# Altium PCB PCB.PcbDoc (part 2 of 2)
Units mm, origin at the board's own origin, x right, y up, seen from the top; angles counter-clockwise.
Board outline 90.42 x 81.53 mm, 4 copper layers (Top Copper, PWR, GND, Bottom Copper), stack 1.57 mm thick; 86 components, 100 nets, 390 pads, 138 vias.
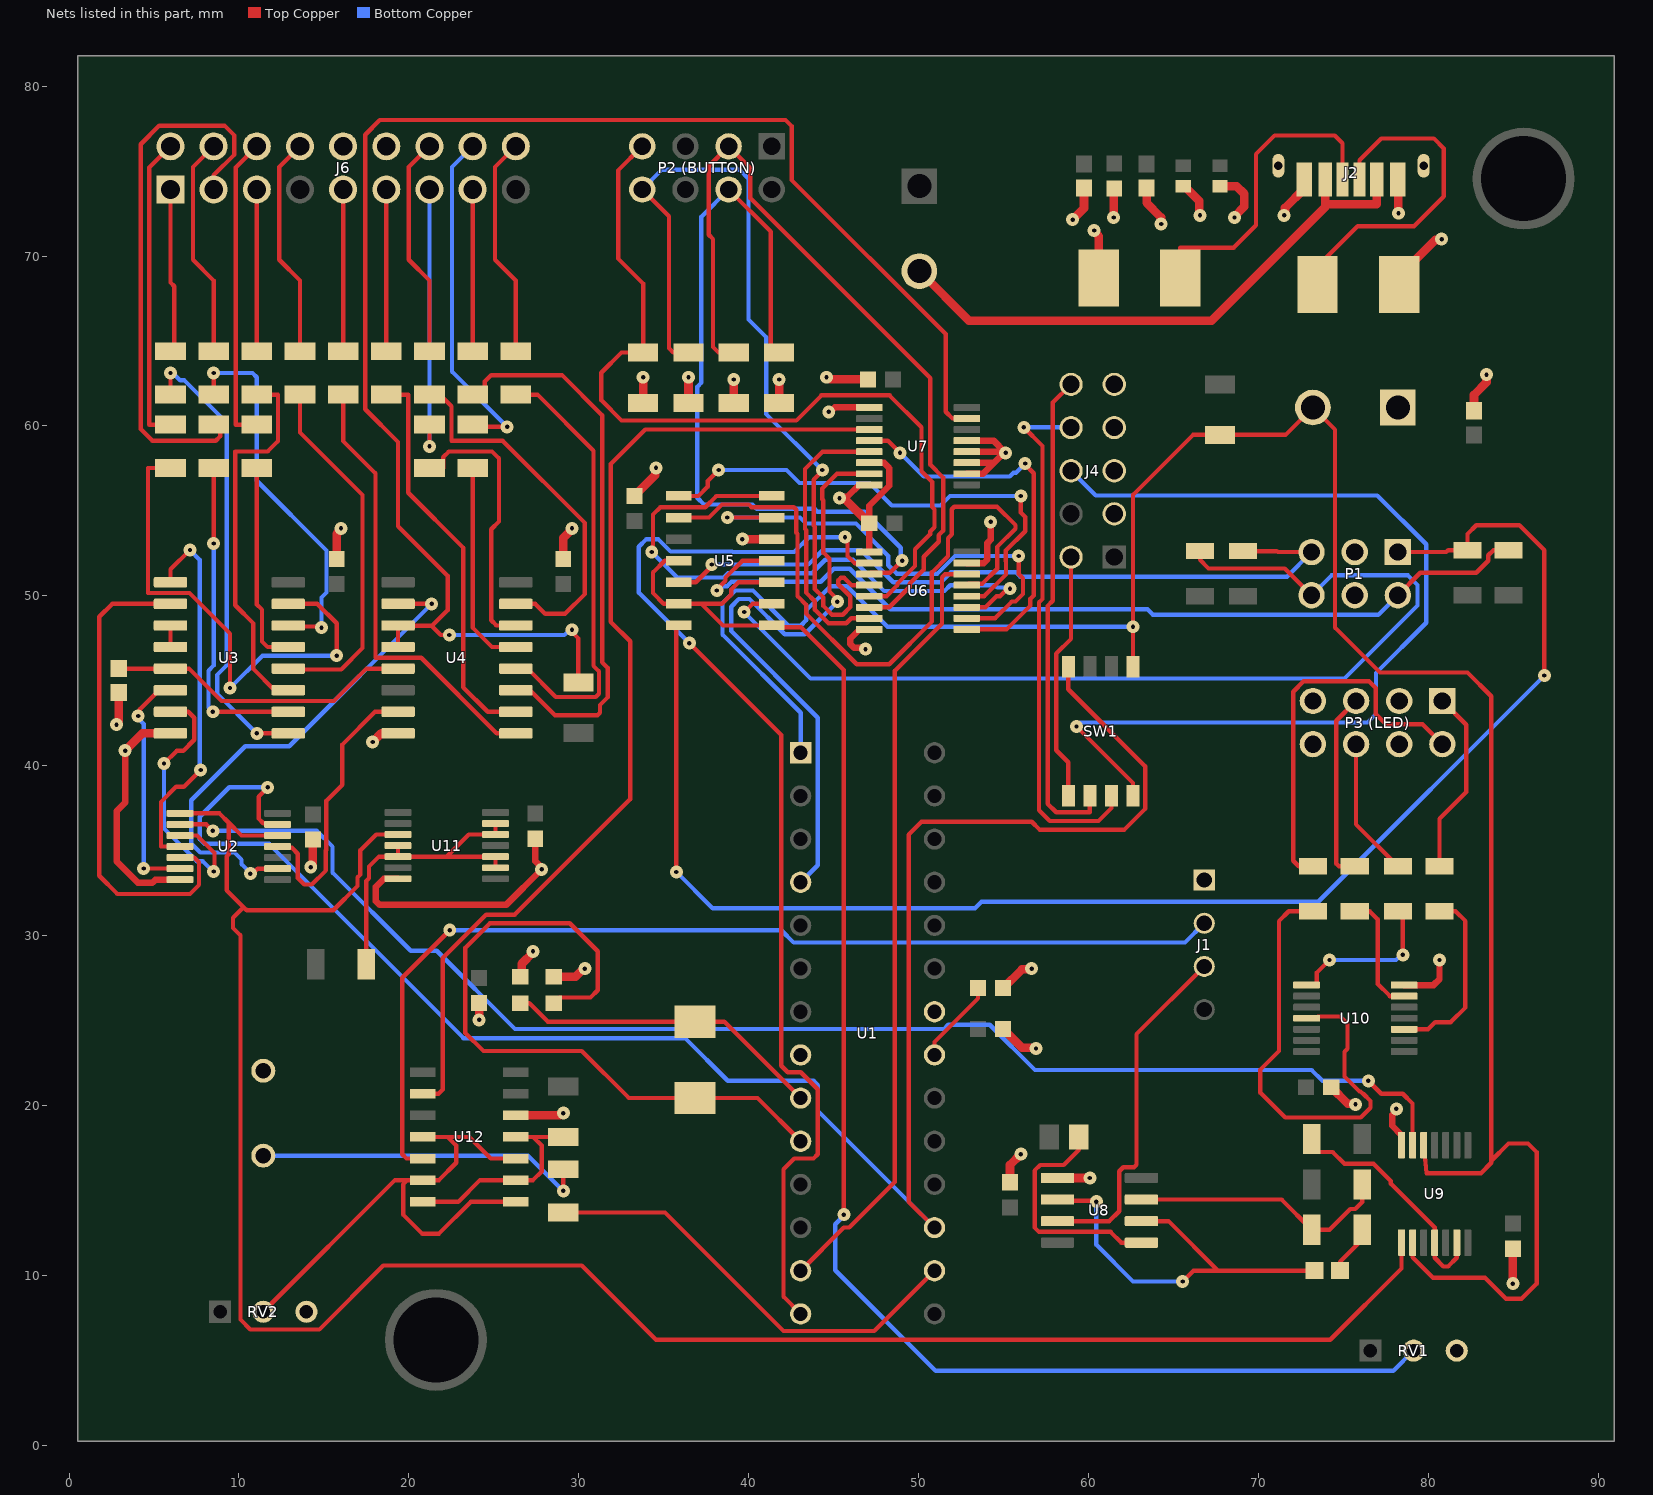
[diagram p4: the nets of this part, all layers, seen from the top]

## Via types
v1: diameter 0.762, hole 0.254, Top Copper to Bottom Copper, 138 vias

## Nets (pads, with @x,y where several pads share a name; then routed paths per layer and width w, separated by ;. In a path a pad name is that pad's centre, name@x,y a point inside that pad or via, vN(x,y) a via of type N, cw(c..) or ccw(c..) an arc to the next point about the centre after c; other vN are vias at no path point) (continued)
"Button 1": "P2 (BUTTON).3" R24.2 U6.6 | length 48.6
  Top Copper w0.254: R24.2@39.116,64.324 38.216,64.324 37.897,64.643 37.897,70.993 37.643,71.247 37.643,75.286 38.811,76.454 40.081,75.184 40.081,73.406 50.673,62.814 50.673,57.723 51.435,56.961 51.435,53.83 51.181,53.576 51.181,53.189 50.292,52.3 50.292,51.544 49.471,50.723 49.471,50.539 48.26,49.328 U6.6@47.092,49.328
"Button 2": "P2 (BUTTON).7" R25.2 U6.5 | length 51.1
  Top Copper w0.254: 33.731,76.454 32.309,75.032 32.309,69.85 33.782,68.377 R25.2@33.782,64.324 32.512,64.324 31.319,63.131 31.319,61.519 32.513,60.325 42.799,60.325 44.272,61.798 48.285,61.798 50.165,59.919 50.165,57.339 50.797,56.706 50.797,55.232 50.927,55.102 50.927,54.04 50.673,53.786 50.673,53.633 49.784,52.744 49.784,51.754 48.753,50.723 48.753,50.632 48.098,49.978 U6.5@47.092,49.978
"Button 3": "P2 (BUTTON).8" R26.2 U6.4 | length 51.5
  Top Copper w0.254: 33.731,73.914 35.306,72.339 35.306,64.578 35.56,64.324 R26.2@36.449,64.324 ; v1(44.325,57.402) 44.325,57.344 43.815,56.834 43.815,54.142 43.881,54.076 43.881,50.407 44.389,49.899 44.389,49.403 44.896,48.895 45.528,48.895 45.974,49.341 45.974,49.973 45.259,50.687 45.259,50.911 45.408,51.06 45.619,51.06 46.05,50.628 U6.4@47.092,50.628
  Bottom Copper w0.254: 33.731,73.914 34.9,75.082 39.446,75.082 39.98,74.549 39.98,66.269 41.021,65.227 41.021,60.706 v1(44.325,57.402)
"Button 4": "P2 (BUTTON).4" R27.2 U6.3 | length 46.3
  Top Copper w0.254: 38.811,73.914 41.3,71.425 41.3,64.324 R27.2@41.783,64.324 ; U6.3@47.092,51.278 47.17,51.356 48.308,51.356 v1(49.022,52.07)
  Bottom Copper w0.254: 38.811,73.914 37.211,72.314 37.211,62.549 36.961,62.299 36.961,55.771 37.36,55.372 40.216,55.372 40.47,55.118 43.878,55.118 44.045,54.951 46.827,54.951 48.946,52.832 48.946,52.146 v1(49.022,52.07)
BUTTONOUT: U6.7 U7.5 | length 16.4
  Top Copper w0.254: U6.7@47.092,48.678 46.029,48.678 45.738,48.387 44.686,48.387 43.881,49.192 43.881,49.689 43.373,50.197 43.373,53.866 43.307,53.932 43.307,57.462 44.332,58.487 U7.5@47.092,58.487
DDOWN: U5.2 U6.13 | length 40
  Top Copper w0.254: U5.2@35.865,54.61 37.657,54.61 38.419,55.372 40.005,55.372 40.157,55.22 42.65,55.22 42.799,55.071 42.799,53.721 42.865,53.656 42.865,49.986 43.373,49.478 43.373,48.956 46.355,45.974 48.26,45.974 50.775,48.489 50.775,51.384 51.72,52.33 51.72,53.397 51.943,53.62 51.943,55.096 52.092,55.245 54.61,55.245 55.691,54.164 55.691,53.953 54.613,52.875 54.613,51.823 54.624,51.812 54.624,51.602 53.729,50.706 52.91,50.706 U6.13@52.832,50.628
DECHO: U7.3 U12.2 | length 60.2
  Top Copper w0.254: U12.2@20.803,20.701 21.742,20.701 21.996,20.955 21.996,28.684 24.555,31.242 26.224,31.242 33.02,38.038 33.02,47.327 31.877,48.47 31.877,57.76 33.904,59.787 U7.3@47.092,59.787
DLEFT: U5.13 U6.10 | length 28.1
  Top Copper w0.254: v1(38.735,54.61) U5.13@41.351,54.61 ; U6.10@52.832,48.678 54.495,48.678 55.482,49.666 55.691,49.666 56.137,50.112 56.137,51.033 55.88,51.29 55.88,52.346 v1(55.883,52.349)
  Bottom Copper w0.254: v1(38.735,54.61) 43.015,54.61 43.37,54.254 46.304,54.254 48.209,52.349 48.209,51.805 48.706,51.308 51.098,51.308 52.139,52.349 v1(55.883,52.349)
DOWN: P1.5 R20.2 U5.5 | length 43.9
  Top Copper w0.254: U5.5@35.865,50.8 36.881,50.8 37.821,51.74 v1(37.821,51.845) ; R20.2@69.088,52.634 71.069,52.634 71.125,52.578 P1.5@73.116,52.578
  Bottom Copper w0.254: v1(37.821,51.845) 37.822,51.843 43.507,51.843 44.354,52.69 46.606,52.69 48.496,50.8 51.308,50.8 51.893,51.384 55.728,51.384 55.982,51.13 71.668,51.13 P1.5@73.116,52.578
DRIGHT: U5.14 U6.11 | length 35.8
  Top Copper w0.254: v1(34.29,52.578) 34.366,52.654 34.366,54.788 34.798,55.22 37.433,55.22 38.094,55.88 U5.14@41.351,55.88 ; U6.11@52.832,49.328 53.925,49.328 54.571,49.974 54.784,49.974 55.238,50.428 v1(55.375,50.428)
  Bottom Copper w0.254: v1(34.29,52.578) 35.785,51.083 38.525,51.083 38.777,51.335 43.718,51.335 44.503,52.121 46.134,52.121 47.963,50.292 51.519,50.292 51.849,50.622 54.486,50.622 54.613,50.495 55.307,50.495 v1(55.375,50.428)
DSCH: C19.1 R29.2 | length 3
  Top Copper w0.254: C19.1@74.791,10.287 74.791,10.82 76.101,12.13 R29.2@76.101,12.7
DUP: U5.1 U6.12 | length 30.1
  Top Copper w0.254: U5.1@35.865,55.88 37.034,55.88 37.582,56.428 37.582,56.759 v1(38.227,57.404) ; U6.12@52.832,49.978 53.848,49.978 55.132,51.262 55.132,52.023 55.121,52.034 55.121,52.665 56.263,53.807 56.263,54.647 56.007,54.902 v1(56.007,55.88)
  Bottom Copper w0.254: v1(38.227,57.404) 42.222,57.404 42.986,56.64 47.097,56.64 48.416,55.321 51.279,55.321 51.838,55.88 v1(56.007,55.88)
ECHO: J1.2 U12.5 | length 60.8
  Top Copper w0.254: U12.5@20.803,16.891 19.863,16.891 19.609,17.145 19.609,27.534 v1(22.403,30.328)
  Bottom Copper w0.254: v1(22.403,30.328) 41.91,30.328 42.636,29.601 65.669,29.601 J1.2@66.802,30.734
GND: "P3 (LED).3" "P3 (LED).4" "P3 (LED).7" "P3 (LED).8" C0.2 C1.2 C2.2 C3.2 C4.2 C5.2 C6.2 C8.2 C9.2 C10.2 C11.2 C12.2 C13.2 C14.2 C15.2 C16.2 C17.2 C20.1 C21.1 C22.1 C23.1 J1.1 J2.A12 J2.B12 J2.S1 J2.S2 J4.03 J4.05 J4.07 J4.09 J5.1 J6.10 J6.12 LS1.N P1.3 P1.4 R2.1 R3.1 R5.1 R24.1 R25.1 R26.1 R27.1 RV1.3 RV2.3 U1.8 U1.22 U2.7 U3.8 U4.8 U5.12 U6.1 U6.8 U6.15 U7.1 U7.6 U7.8 U7.10 U7.11 U7.12 U7.13 U8.1 U9.7 U10.7 U11.7 U12.12 | length 130.8
  Top Copper w0.381: v1(3.302,40.894) 3.302,37.842 2.794,37.334 2.794,34.385 4.052,33.126 4.905,33.126 5.081,33.302 U2.7@6.528,33.302 ; U11.7@19.355,33.356 19.341,33.341 18.511,33.341 18.059,32.889 18.059,32.037 18.282,31.813 25.717,31.813 v1(27.813,33.909) 27.813,34.012 27.432,34.393 C22.1@27.432,35.711 ; v1(44.704,60.833) 44.807,60.833 45.061,61.087 U7.1@47.092,61.087 ; v1(45.339,55.753) 45.412,55.826 45.801,55.826 46.512,56.537 U7.8@47.092,56.537 ; v1(46.863,46.863) 46.79,46.936 46.201,46.936 45.968,47.169 45.968,47.484 46.498,48.014 47.078,48.014 U6.8@47.092,48.028 ; U6.1@47.092,52.578 C15.2@47.092,54.268 47.093,54.269 47.093,55.305 48.268,56.479 48.268,57.524 47.969,57.823 47.107,57.823 U7.6@47.092,57.837 ; U6.15@52.832,51.928 53.818,51.928 54.042,52.151 54.042,53.112 54.229,53.3 v1(54.229,54.356) ; U7.10@52.832,57.187 53.782,57.188 54.432,57.837 ; U7.11@52.832,57.837 54.432,57.837 ; U7.12@52.832,58.487 v1@55.051,58.487 ; U7.13@52.832,59.137 54.401,59.137 v1@55.051,58.487 ; v1(78.105,19.812) 78.105,19.709 77.858,19.462 77.858,18.811 78.397,18.272 78.397,17.692 U9.7@78.411,17.678 ; U10.7@78.562,27.096 80.295,27.096 80.645,27.446 v1(80.645,28.575) ; 54.432,57.837 55.015,58.42 v1(55.118,58.42) v1@55.051,58.487
  Top Copper w0.508: v1(2.794,42.418) 2.794,42.487 2.921,42.614 R5.1@2.921,44.318 ; v1(3.302,40.894) 4.318,41.91 U3.8@5.969,41.91 ; v1(14.224,34.036) 14.224,34.105 14.351,34.232 C10.2@14.351,35.657 ; C11.2@15.748,52.173 15.748,53.652 16.002,53.906 v1(16.002,53.975) ; v1(17.866,41.402) 18.374,41.91 U4.8@19.359,41.91 ; v1(24.13,25.052) C23.1@24.13,26.035 ; U12.12@26.289,19.431 28.887,19.431 29.014,19.558 v1(29.083,19.558) ; C8.2@26.543,27.585 26.642,27.684 26.642,28.351 27.305,29.014 v1(27.305,29.083) ; C9.2@28.524,27.585 29.802,27.585 30.284,28.067 v1(30.353,28.067) ; C12.2@29.083,52.173 29.083,53.41 29.591,53.918 v1(29.591,53.975) ; C13.2@33.274,55.88 33.274,55.89 34.495,57.111 34.495,57.482 v1(34.544,57.531) ; R25.1@33.782,61.354 v1(33.782,62.865) ; R26.1@36.449,61.354 v1(36.449,62.865) ; R24.1@39.116,61.354 v1(39.116,62.738) ; v1(39.624,53.34) U5.12@41.351,53.34 ; R27.1@41.783,61.354 v1(41.783,62.738) ; v1(44.577,62.865) 44.646,62.865 44.773,62.738 C16.2@47.014,62.738 ; v1@45.646,55.704 47.082,54.268 C15.2@47.092,54.268 ; C4.2@54.967,24.511 54.977,24.511 56.071,23.417 56.847,23.417 v1(56.896,23.368) ; C5.2@54.967,26.924 54.977,26.924 56.071,28.018 56.593,28.018 v1(56.642,28.067) ; C17.2@55.372,15.494 55.372,16.51 v1(56.007,17.145) ; U8.1@58.166,15.748 v1(60.071,15.748) ; v1(59.055,72.136) 59.725,72.806 C14.2@59.725,74.002 ; v1(60.325,71.501) 60.325,71.432 60.587,71.17 R2.1@60.587,68.707 ; v1(61.468,72.263) 61.485,72.28 61.485,73.956 C3.2@61.503,73.973 ; C2.2@63.408,74.002 63.408,73.127 64.262,72.273 v1(64.262,71.881) ; C1.2@65.567,74.111 65.642,74.111 66.499,73.253 66.499,72.439 v1(66.548,72.39) ; C0.2@67.726,74.111 68.706,74.111 69.157,73.66 69.157,72.909 68.58,72.332 v1(68.58,72.263) ; v1(71.501,72.39) 71.55,72.439 71.55,72.823 72.688,73.961 J2.B12@72.688,74.511 ; C21.1@74.271,21.082 74.281,21.082 75.238,20.125 75.654,20.125 v1(75.702,20.076) ; J2.A12@78.188,74.511 78.21,74.489 78.21,72.539 v1(78.232,72.517) ; R3.1@78.276,68.326 78.276,68.826 80.394,70.944 80.723,70.944 v1(80.772,70.993) ; C6.2@82.677,60.893 82.677,61.827 83.414,62.564 v1(83.414,63.015) ; v1(84.963,9.525) C20.1@84.963,11.581
IMUXA: U1.13 U6.14 | length 46
  Top Copper w0.254: U1.13@43.053,10.287 45.593,12.827 45.909,12.827 48.59,15.509 48.59,45.586 51.365,48.361 51.365,51.101 51.543,51.278 U6.14@52.832,51.278
IMUXB: U1.14 U6.2 | length 67.5
  Top Copper w0.254: v1(36.5,47.219) 41.91,41.808 41.91,22.352 42.291,21.971 43.053,21.971 44.059,20.965 44.059,17.145 43.805,16.891 42.672,16.891 42.037,16.256 42.037,8.763 U1.14@43.053,7.747 ; v1(45.659,53.452) 45.81,53.301 45.81,52.346 46.228,51.928 U6.2@47.092,51.928
  Bottom Copper w0.254: v1(36.5,47.219) 33.528,50.19 33.528,52.894 33.974,53.34 34.666,53.34 35.399,52.607 39.018,52.607 39.048,52.578 42.667,52.578 43.541,53.452 v1(45.659,53.452)
INC: U2.1 U2.12 U9.8 U11.3 | length 123.8
  Top Copper w0.254: U2.1@6.528,37.202 8.848,37.202 9.398,36.652 ; U2.12@12.268,35.902 10.148,35.902 9.398,36.652 ; U11.3@19.355,35.956 18.074,35.956 17.145,35.027 17.145,33.6 16.979,33.434 16.979,32.922 15.553,31.496 10.458,31.496 10.271,31.683 ; U9.8@78.411,11.938 78.411,10.416 74.218,6.223 34.544,6.223 30.175,10.592 18.491,10.592 14.732,6.833 10.668,6.833 10.084,7.417 10.084,30.023 9.652,30.455 9.652,31.064 10.271,31.683 ; 9.398,36.652 9.398,34.798 9.271,34.671 9.271,32.683 10.271,31.683
INPUT: U1.4 U7.7 | length 37
  Top Copper w0.254: v1(45.212,49.657) 45.212,49.794 44.751,50.255 44.751,52.182 44.389,52.545 44.389,55.626 44.323,55.691 44.323,56.323 45.187,57.187 U7.7@47.092,57.187
  Bottom Copper w0.254: U1.4@43.053,33.147 44.059,34.153 44.059,42.833 38.962,47.93 38.962,49.365 39.408,49.811 40.039,49.811 42.111,47.739 43.294,47.739 v1(45.212,49.657)
JOYSTICKOUT: U6.9 U7.4 | length 23.3
  Top Copper w0.254: U7.4@47.092,59.137 48.178,59.137 v1(48.895,58.42) ; U6.9@52.832,48.028 55.165,48.028 56.57,49.433 56.57,49.826 56.771,50.027 56.771,57.217 56.261,57.727 v1(56.261,57.785)
  Bottom Copper w0.254: v1(48.895,58.42) 50.292,57.023 55.354,57.023 55.577,57.246 55.722,57.246 v1(56.261,57.785)
LED1: R31.1 U10.3 | length 11
  Top Copper w0.254: U10.3@78.562,24.496 79.97,24.496 80.391,24.917 81.305,24.917 82.169,25.781 82.169,30.861 81.59,31.44 R31.1@80.645,31.44
LED1A: J6.6 R6.2 | length 18.1
  Top Copper w0.254: R6.2@11.049,60.076 9.804,60.076 9.804,75.209 J6.6@11.049,76.454
LED1B: J6.8 R7.2 | length 13.1
  Top Copper w0.254: R7.2@13.589,64.394 13.589,68.555 12.37,69.774 12.37,75.235 J6.8@13.589,76.454
LED1C: J6.5 R8.2 | length 9.5
  Top Copper w0.254: R8.2@11.049,64.394 J6.5@11.049,73.914
LED1D: J6.3 R9.2 | length 32.8
  Top Copper w0.254: R9.2@8.509,60.076 8.89,60.076 8.89,59.385 8.636,59.131 4.902,59.131 4.216,59.817 4.216,76.581 5.309,77.673 9.144,77.673 9.728,77.089 9.728,75.968 8.509,74.748 J6.3@8.509,73.914
LED1E: J6.1 R10.2 | length 9.8
  Top Copper w0.254: R10.2@5.969,64.394 6.188,64.394 6.188,68.224 5.969,68.444 J6.1@5.969,73.914
LED1F: J6.2 R11.2 | length 18.1
  Top Copper w0.254: R11.2@5.969,60.076 4.724,60.076 4.724,75.209 J6.2@5.969,76.454
LED1G: J6.4 R12.2 | length 13.1
  Top Copper w0.254: R12.2@8.509,64.394 8.509,68.555 7.29,69.774 7.29,75.235 J6.4@8.509,76.454
LED2: R32.1 U10.6 | length 7.2
  Top Copper w0.254: R32.1@75.656,31.44 76.533,31.44 77.008,30.965 77.008,27.162 77.724,26.446 U10.6@78.562,26.446
LED2A: J6.16 R13.2 | length 20.4
  Top Copper w0.254: R13.2@23.749,60.076 23.881,59.944 v1(25.781,59.944)
  Bottom Copper w0.254: J6.16@23.749,76.454 22.53,75.235 22.53,63.195 v1(25.781,59.944)
LED2B: J6.18 R14.2 | length 13.1
  Top Copper w0.254: R14.2@26.289,64.394 26.289,68.555 25.07,69.774 25.07,75.235 J6.18@26.289,76.454
LED2C: J6.15 R15.2 | length 9.5
  Top Copper w0.254: R15.2@23.749,64.394 J6.15@23.749,73.914
LED2D: J6.11 R16.2 | length 9.5
  Top Copper w0.254: R16.2@18.669,64.394 J6.11@18.669,73.914
LED2E: J6.9 R17.2 | length 9.5
  Top Copper w0.254: R17.2@16.129,64.394 J6.9@16.129,73.914
LED2F: J6.14 R18.2 | length 13.1
  Top Copper w0.254: R18.2@21.209,64.394 21.209,68.555 19.99,69.774 19.99,75.235 J6.14@21.209,76.454
LED2G: J6.13 R19.2 | length 16.4
  Top Copper w0.254: v1(21.209,58.801) R19.2@21.209,60.076
  Bottom Copper w0.254: v1(21.209,58.801) J6.13@21.209,73.914
LED3: R33.1 U10.8 | length 9.6
  Top Copper w0.254: U10.8@72.822,27.096 73.351,27.096 73.429,27.174 73.429,27.836 v1(74.168,28.575) ; R33.1@78.196,31.44 78.486,31.44 v1(78.486,28.88)
  Bottom Copper w0.254: v1(74.168,28.575) 78.083,28.575 78.388,28.88 v1(78.486,28.88)
LED4: R34.1 U10.11 | length 28.4
  Top Copper w0.254: U10.11@72.822,25.146 73.381,25.146 73.482,25.248 74.803,25.248 75.235,24.816 75.235,23.346 75.057,23.168 75.057,21.717 75.935,20.838 76.001,20.838 76.138,20.701 76.155,20.701 76.581,20.275 76.581,19.877 76.008,19.304 71.566,19.304 70.104,20.766 70.104,22.123 71.196,23.216 71.196,30.861 71.775,31.44 R34.1@73.196,31.44
LEFT: P1.2 R23.2 U5.11 | length 54.1
  Top Copper w0.254: v1(38.122,50.321) 38.122,50.388 38.627,50.893 38.627,51.073 39.624,52.07 U5.11@41.351,52.07 ; P1.2@78.196,50.038 79.517,51.359 82.804,51.359 83.515,52.07 83.515,52.385 83.82,52.69 R23.2@84.709,52.69
  Bottom Copper w0.254: v1(38.122,50.321) 38.259,50.321 38.513,50.575 38.735,50.575 38.987,50.827 44.233,50.827 45.004,51.598 45.939,51.598 48.328,49.208 63.466,49.208 63.779,48.895 70.928,48.895 70.941,48.882 77.04,48.882 P1.2@78.196,50.038
"Logical 0": R5.2 U3.5 U4.5 | length 18
  Top Copper w0.254: R5.2@2.921,45.72 U3.5@5.969,45.72 7.061,45.72 8.966,43.815 15.596,43.815 17.501,45.72 U4.5@19.359,45.72
"Logical 1": U3.3 U3.4 | length 1.3
  Top Copper w0.254: U3.4@5.969,46.99 U3.3@5.969,48.26
NetC5_1: C5.1 U1.21 | length 5
  Top Copper w0.254: U1.21@50.927,22.987 50.927,23.749 53.491,26.313 C5.1@53.491,26.924
NetC18_1: C18.1 U8.5 | length 13.9
  Top Copper w0.254: C18.1@59.422,18.161 59.422,17.399 58.533,16.51 57.15,16.51 56.82,16.18 56.82,12.827 57.074,12.573 61.29,12.573 61.925,11.938 U8.5@63.106,11.938
NetC19_2: C19.2 U8.2 U8.6 | length 24.6
  Top Copper w0.254: U8.2@58.166,14.478 58.229,14.414 60.389,14.414 v1(60.452,14.351) ; U8.6@63.106,13.208 64.694,13.208 67.615,10.287 ; v1(65.532,9.652) 66.167,10.287 67.615,10.287 ; C19.2@73.291,10.287 67.615,10.287
  Bottom Copper w0.254: v1(60.452,14.351) 60.452,11.811 62.611,9.652 v1(65.532,9.652)
NetJ2_A5: J2.A5 R2.2 | length 18.8
  Top Copper w0.254: R2.2@65.397,68.707 65.397,70.485 68.529,70.485 69.85,71.806 69.85,75.997 70.942,77.089 74.484,77.089 74.938,76.635 J2.A5@74.938,74.511
NetJ2_A9: J2.A9 J2.B9 J3.2 | length 34
  Top Copper w0.508: J3.2@50.038,69.111 52.957,66.192 67.234,66.192 73.918,72.877 73.918,73.05 ; J2.B9@73.918,74.511 73.918,73.05 ; J2.A9@76.958,74.511 76.958,73.05 73.918,73.05
NetJ2_B5: J2.B5 R3.2 | length 19.9
  Top Copper w0.254: R3.2@73.466,68.326 73.466,69.393 75.828,71.755 79.146,71.755 80.899,73.508 80.899,76.327 80.315,76.911 77.216,76.911 75.938,75.633 J2.B5@75.938,74.511
NetLS1_P: LS1.P R36.2 | length 19.8
  Top Copper w0.254: v1(29.083,14.986) R36.2@29.083,16.261
  Bottom Copper w0.254: LS1.P@11.43,17.058 27.011,17.058 v1(29.083,14.986)
"NetP3 (LED)_1": "P3 (LED).1" R31.2 | length 11
  Top Copper w0.254: R31.2@80.645,34.092 80.645,36.881 82.22,38.456 82.22,42.411 80.816,43.815
"NetP3 (LED)_2": "P3 (LED).2" R34.2 | length 22.7
  Top Copper w0.254: R34.2@73.196,34.092 72.359,34.092 72.034,34.417 72.034,44.361 72.644,44.971 76.498,44.971 76.892,44.577 76.892,43.053 77.502,42.443 79.648,42.443 80.816,41.275
"NetP3 (LED)_5": "P3 (LED).5" R32.2 | length 11.2
  Top Copper w0.254: R32.2@75.656,34.092 74.727,34.092 74.574,34.244 74.574,42.653 75.736,43.815
"NetP3 (LED)_6": "P3 (LED).6" R33.2 | length 8.2
  Top Copper w0.254: 75.736,41.275 75.736,36.552 R33.2@78.196,34.092
NetR6_1: R6.1 U3.13 | length 12
  Top Copper w0.254: R6.1@11.049,57.526 11.049,49.497 11.355,49.191 11.355,47.319 11.684,46.99 U3.13@12.899,46.99
NetR7_1: R7.1 U3.12 | length 21.4
  Top Copper w0.254: U3.12@12.899,45.72 13.437,45.72 13.487,45.669 16.013,45.669 17.272,46.928 17.272,55.931 13.589,59.614 R7.1@13.589,61.844
NetR8_1: R8.1 U3.11 | length 22.6
  Top Copper w0.254: R8.1@11.049,61.844 12.294,61.844 12.294,59.106 11.684,58.496 9.779,58.496 9.779,49.447 10.847,48.378 10.847,45.693 12.09,44.45 U3.11@12.899,44.45
NetR9_1: R9.1 U3.10 | length 19
  Top Copper w0.254: v1(8.458,43.18) U3.10@12.899,43.18 ; v1(8.509,53.086) R9.1@8.509,57.526
  Bottom Copper w0.254: v1(8.458,43.18) 8.204,43.434 8.204,45.593 8.509,45.898 v1(8.509,53.086)
NetR10_1: R10.1 U3.9 | length 27.1
  Top Copper w0.254: R10.1@5.969,61.844 v1(5.969,63.119) ; v1(11.049,41.91) U3.9@12.899,41.91
  Bottom Copper w0.254: v1(5.969,63.119) 6.106,63.119 6.545,62.681 6.788,62.681 9.271,60.198 9.271,45.898 8.712,45.339 8.712,44.247 v1(11.049,41.91)
NetR11_1: R11.1 U3.15 | length 30
  Top Copper w0.254: R11.1@5.969,57.526 4.648,57.526 4.648,50.165 7.087,50.165 9.474,47.777 v1(9.474,44.577) ; U3.15@12.899,49.53 14.605,49.53 15.748,48.387 v1(15.748,46.482)
  Bottom Copper w0.254: v1(9.474,44.577) 11.379,46.482 v1(15.748,46.482)
NetR12_1: R12.1 U3.14 | length 22.5
  Top Copper w0.254: R12.1@8.509,61.844 v1(8.509,63.119) ; U3.14@12.899,48.26 12.962,48.197 14.795,48.197 v1(14.859,48.133)
  Bottom Copper w0.254: v1(8.509,63.119) 10.795,63.119 11.049,62.865 11.049,56.777 15.154,52.672 15.154,50.198 14.859,49.903 v1(14.859,48.133)
NetR13_1: R13.1 U4.13 | length 12.4
  Top Copper w0.254: R13.1@23.749,57.526 23.749,48.133 24.892,46.99 U4.13@26.289,46.99
NetR14_1: R14.1 U4.12 | length 26
  Top Copper w0.254: U4.12@26.289,45.72 26.969,45.72 28.644,44.045 30.992,44.045 31.184,44.237 31.184,45.558 30.861,45.881 30.861,58.545 27.562,61.844 R14.1@26.289,61.844
NetR15_1: R15.1 U4.11 | length 33
  Top Copper w0.254: R15.1@23.749,61.844 24.46,61.844 24.46,62.611 24.841,62.992 29.007,62.992 31.369,60.63 31.369,46.091 31.692,45.768 31.692,44.026 31.242,43.576 31.242,43.126 31.093,42.977 28.6,42.977 27.127,44.45 U4.11@26.289,44.45
NetR16_1: R16.1 U4.10 | length 23.5
  Top Copper w0.254: R16.1@18.669,61.844 19.964,61.844 19.964,56.066 23.19,52.84 23.19,44.628 24.638,43.18 U4.10@26.289,43.18
NetR17_1: R17.1 U4.9 | length 26.4
  Top Copper w0.254: R17.1@16.129,61.844 16.129,59.114 18.034,57.209 18.034,46.355 20.727,46.355 25.172,41.91 U4.9@26.289,41.91
NetR18_1: R18.1 U4.15 | length 22.4
  Top Copper w0.254: R18.1@21.209,61.844 21.824,61.844 22.504,61.163 22.504,59.131 25.512,59.131 30.353,54.291 30.353,50.114 29.185,48.946 28.016,48.946 27.432,49.53 U4.15@26.289,49.53
NetR19_1: R19.1 U4.14 | length 16.3
  Top Copper w0.254: R19.1@21.209,57.526 22.022,57.526 22.022,58.166 22.352,58.496 24.892,58.496 25.298,58.09 25.298,54.381 24.841,53.924 24.841,48.565 25.146,48.26 U4.14@26.289,48.26
NetR28_1: R28.1 R29.1 U8.7 | length 15.4
  Top Copper w0.254: U8.7@63.106,14.478 71.353,14.478 R29.1@73.131,12.7 74.168,12.7 75.387,13.919 75.692,13.919 76.101,14.328 R28.1@76.101,15.367
NetR30_1: R30.1 U9.11 U9.13 | length 14.1
  Top Copper w0.254: R30.1@73.131,18.034 73.131,17.674 73.529,17.276 74.356,17.276 75.053,16.579 76.761,16.579 77.775,15.566 77.775,15.413 80.361,12.827 U9.11@80.361,11.938 80.361,11.049 80.869,10.541 81.153,10.541 81.661,11.049 U9.13@81.661,11.938
NetR35_1: R35.1 U11.4 U11.5 U11.9 U11.10 U11.12 U11.13 | length 18.9
  Top Copper w0.254: R35.1@17.487,28.321 17.487,33.223 17.653,33.389 17.653,34.075 18.234,34.656 U11.5@19.355,34.656 ; U11.4@19.355,35.306 U11.5@19.355,34.656 ; U11.9@25.095,34.006 U11.10@25.095,34.656 22.225,34.656 ; U11.13@25.095,36.606 U11.12@25.095,35.956 23.525,35.956 22.225,34.656 ; U11.5@19.355,34.656 22.225,34.656
NetR37_1: R37.1 U12.7 U12.9 U12.11 | length 12.8
  Top Copper w0.254: U12.7@20.803,14.351 22.911,14.351 24.181,15.621 U12.9@26.289,15.621 27.305,15.621 27.813,16.129 27.813,17.653 27.305,18.161 ; U12.11@26.289,18.161 27.305,18.161 ; R37.1@29.083,18.161 27.305,18.161
NetRV1_2: RV1.2 U5.4 U5.6 U5.8 U5.10 | length 93.5
  Top Copper w0.254: U5.4@35.865,52.07 35.052,52.07 34.366,51.384 34.366,50.165 35.001,49.53 U5.6@35.865,49.53 37.211,49.53 ; U5.10@41.351,50.8 39.392,50.8 38.962,50.37 38.962,50.083 38.408,49.53 37.211,49.53 ; v1(45.593,13.589) 45.593,45.637 43.074,48.155 41.456,48.155 U5.8@41.351,48.26 38.481,48.26 37.211,49.53
  Bottom Copper w0.254: v1(45.593,13.589) 45.593,13.527 45.085,13.019 45.085,10.312 51.003,4.394 77.927,4.394 RV1.2@79.121,5.588
NetRV2_2: RV2.2 U12.4 U12.6 U12.8 U12.10 | length 32.7
  Top Copper w0.254: RV2.2@11.43,7.874 19.177,15.621 19.914,15.621 ; U12.4@20.803,18.161 22.276,18.161 ; U12.8@26.289,14.351 23.647,14.351 21.768,12.471 20.777,12.471 19.66,13.589 19.66,15.367 19.914,15.621 ; U12.10@26.289,16.891 24.816,16.891 23.546,18.161 22.276,18.161 ; 19.914,15.621 U12.6@20.803,15.621 21.768,15.621 22.784,16.637 22.784,17.653 22.276,18.161
NetU2_3: U2.3 U3.7 | length 16.6
  Top Copper w0.254: v1(5.588,40.132) 6.335,40.879 6.716,40.879 7.366,41.529 7.366,42.824 7.01,43.18 U3.7@5.969,43.18 ; U2.3@6.528,35.902 7.532,35.902 8.56,34.874 8.56,33.833 v1(8.509,33.782)
  Bottom Copper w0.254: v1(5.588,40.132) 5.588,36.315 7.511,34.392 7.861,34.392 8.471,33.782 v1(8.509,33.782)
NetU2_4: U2.4 U3.1 | length 22.4
  Top Copper w0.254: U3.1@5.969,50.8 5.969,51.562 v1(7.112,52.705) ; U2.4@6.528,35.252 5.41,35.252 5.41,37.871 6.301,38.763 6.759,38.763 v1(7.747,39.751)
  Bottom Copper w0.254: v1(7.112,52.705) 7.112,52.703 7.696,52.119 7.696,39.802 v1(7.747,39.751)
NetU2_5: U2.5 U3.2 | length 28.8
  Top Copper w0.254: U3.2@5.969,49.53 2.54,49.53 1.778,48.768 1.778,33.528 2.845,32.461 7.112,32.461 7.645,32.995 7.645,34.323 7.366,34.602 U2.5@6.528,34.602
NetU2_6: U2.6 U3.6 | length 14
  Top Copper w0.254: v1(4.064,42.926) 4.161,43.023 4.161,43.322 5.289,44.45 U3.6@5.969,44.45 ; v1(4.394,33.952) U2.6@6.528,33.952
  Bottom Copper w0.254: v1(4.064,42.926) 4.064,42.789 4.394,42.458 v1(4.394,33.952)
NetU2_9: U2.9 U4.2 | length 29.6
  Top Copper w0.254: v1(10.668,33.655) 10.805,33.655 11.102,33.952 U2.9@12.268,33.952 ; U4.2@19.359,49.53 v1(21.336,49.53)
  Bottom Copper w0.254: v1(10.668,33.655) 10.668,33.696 10.149,34.214 10.149,34.478 9.728,34.9 7.722,34.9 7.188,35.433 7.188,37.973 10.363,41.148 12.954,41.148 v1(21.336,49.53)
NetU2_11: U2.11 U4.7 | length 16.8
  Top Copper w0.254: U2.11@12.268,35.252 12.346,35.174 13.118,35.174 13.462,34.83 13.462,33.401 13.843,33.02 14.286,33.02 15.113,33.847 15.113,35.017 15.143,35.047 15.143,37.941 16.084,38.882 16.084,41.255 18.009,43.18 U4.7@19.359,43.18
PB3: J4.02 SW1.1.1 | length 14.7
  Top Copper w0.254: SW1.1.1@58.801,38.242 58.801,40.208 58.094,40.915 58.094,46.602 58.963,47.471 J4.02@58.963,52.285
PB4: J4.10 SW1.2.1 | length 28.9
  Top Copper w0.254: J4.10@58.963,62.445 57.892,61.374 57.892,49.711 57.586,49.405 57.586,37.766 58.09,37.262 60.071,37.262 SW1.2.1@60.071,38.242
PB5: J4.08 SW1.3.1 | length 31.4
  Top Copper w0.254: v1(56.185,59.919) 57.279,58.825 57.279,49.817 57.078,49.616 57.078,37.385 57.709,36.754 60.579,36.754 61.341,37.516 SW1.3.1@61.341,38.242
  Bottom Copper w0.254: v1(56.185,59.919) 58.949,59.919 J4.08@58.963,59.905
PC6: J4.06 SW1.4.1 | length 57.3
  Top Copper w0.254: v1(59.284,42.316) 62.611,38.989 SW1.4.1@62.611,38.242
  Bottom Copper w0.254: J4.06@58.963,57.365 60.422,55.905 76.987,55.905 79.86,53.033 79.86,48.415 76.911,45.466 76.911,43.053 76.403,42.545 59.512,42.545 v1(59.284,42.316)
PULLUP1: R4.2 U4.3 U4.4 U7.15 | length 96
  Top Copper w0.254: U4.4@19.359,46.99 U4.3@19.359,48.26 ; v1(22.377,47.701) 21.869,47.701 21.349,48.222 ; v1(29.591,48.006) 29.591,47.869 29.972,47.488 R4.2@29.972,44.897 ; U7.15@52.832,60.437 51.983,60.437 51.587,60.833 51.587,65.405 42.52,74.473 42.52,77.648 42.164,78.003 18.288,78.003 17.424,77.14 17.424,60.985 19.355,59.055 19.355,54.102 22.276,51.181 22.276,49.149 21.349,48.222 ; U4.3@19.359,48.26 21.349,48.222 ; U4.3@19.359,48.26 21.311,48.26 21.349,48.222
  Bottom Copper w0.254: v1(22.377,47.701) 29.149,47.701 29.454,48.006 v1(29.591,48.006)
RESET: J5.2 R1.2 SW1.4.2 U1.1 U9.5 U9.9 | length 139.3
  Top Copper w0.254: SW1.4.2@62.611,45.832 v1(62.611,48.184) 62.611,55.944 66.142,59.475 R1.2@67.726,59.475 71.584,59.475 J5.2@73.196,61.087 74.498,59.785 74.498,48.133 77.14,45.491 82.296,45.491 83.693,44.094 83.693,16.764 ; U9.9@79.061,11.938 79.061,11.084 80.264,9.881 83.317,9.881 84.562,8.636 85.471,8.636 86.36,9.525 86.36,17.272 85.852,17.78 84.709,17.78 83.693,16.764 ; U9.5@79.711,17.678 79.883,16.027 83.083,16.027 83.693,16.637 83.693,16.764
  Bottom Copper w0.254: U1.1@43.053,40.767 43.053,43.121 38.454,47.72 38.454,49.575 39.198,50.319 40.25,50.319 42.322,48.247 43.053,48.247 43.373,48.567 43.373,49.139 44.806,50.571 45.771,50.571 48.158,48.184 v1(62.611,48.184)
RIGHT: P1.6 R22.2 U5.9 | length 61
  Top Copper w0.254: v1(39.724,49.049) 39.74,49.049 40.221,49.53 U5.9@41.351,49.53 ; R22.2@66.548,52.634 66.548,52.121 67.056,51.613 71.541,51.613 P1.6@73.116,50.038
  Bottom Copper w0.254: v1(39.724,49.049) 43.637,45.136 75.057,45.136 79.352,49.431 79.352,50.645 78.791,51.206 74.284,51.206 P1.6@73.116,50.038
RST7: U2.2 U9.6 | length 82.9
  Top Copper w0.254: U2.2@6.528,36.552 8.076,36.552 v1(8.458,36.17) ; v1(76.454,21.463) 77.216,20.701 78.486,20.701 79.061,20.126 U9.6@79.061,17.678
  Bottom Copper w0.254: v1(8.458,36.17) 14.58,36.17 15.506,35.243 15.506,33.715 20.108,29.113 21.636,29.113 26.238,24.511 51.486,24.511 51.74,24.765 54.178,24.765 56.845,22.098 73.12,22.098 73.755,21.463 v1(76.454,21.463)
SCORE: SW1.1.2 U1.17 U2.13 | length 111.8
  Top Copper w0.254: v1(11.684,38.735) 11.684,38.713 11.156,38.185 11.156,36.896 11.427,36.625 11.61,36.625 11.683,36.552 U2.13@12.268,36.552 ; U1.17@50.927,12.827 49.413,14.341 49.413,35.951 50.165,36.703 56.656,36.703 57.113,36.246 62.103,36.246 63.322,37.465 63.322,39.98 58.801,44.501 SW1.1.2@58.801,45.832
  Bottom Copper w0.254: v1(11.684,38.735) 9.423,38.735 7.696,37.008 7.696,35.687 7.976,35.408 11.775,35.408 23.205,23.978 36.246,23.978 38.76,21.463 43.815,21.463 44.069,21.209 44.069,19.685 U1.17@50.927,12.827
SPKR: R36.1 U1.16 | length 26.2
  Top Copper w0.254: R36.1@29.083,13.711 35.067,13.711 42.037,6.741 47.381,6.741 U1.16@50.927,10.287
TRIG: J1.3 U8.3 | length 20.7
  Top Copper w0.254: U8.3@58.166,13.208 61.214,13.208 61.794,13.788 61.794,16.14 62.029,16.375 62.67,16.375 62.819,16.524 62.819,24.211 J1.3@66.802,28.194
UP: P1.1 R21.2 U5.7 | length 90.1
  Top Copper w0.254: v1(35.738,33.757) 35.738,48.26 U5.7@35.865,48.26 ; P1.1@78.196,52.578 81.044,52.578 81.157,52.69 R21.2@82.296,52.69 82.296,53.645 82.804,54.153 85.344,54.153 86.817,52.68 v1(86.817,45.314)
  Bottom Copper w0.254: v1(35.738,33.757) 37.871,31.623 53.315,31.623 53.696,32.004 73.508,32.004 v1(86.817,45.314)
XTAL1: C8.1 U1.9 Y1.2 | length 18.8
  Top Copper w0.254: C8.1@26.543,26.035 27.076,26.035 28.164,24.947 Y1.2@36.83,24.947 38.553,24.947 U1.9@43.053,20.447
XTAL2: C9.1 U1.10 Y1.1 | length 41.7
  Top Copper w0.254: C9.1@28.524,26.035 28.857,26.368 30.686,26.368 31.115,26.797 31.115,29.083 29.464,30.734 24.765,30.734 23.317,29.286 23.317,24.282 24.384,23.216 30.175,23.216 32.944,20.447 Y1.1@36.83,20.447 40.513,20.447 U1.10@43.053,17.907
pads on no net: C18.2 J4.04 J6.7 J6.17 U1.2 U1.3 U1.5 U1.6 U1.11 U1.12 U1.15 U1.23 U1.24 U1.25 U1.26 U1.27 U1.28 U7.9 U9.10 U9.12 U11.6 U11.8 U11.11 U12.1 U12.13 U12.14

## Polygon pours and split planes (outlines as drawn)
+5 on PWR (split plane): 90.422,0.764 1.018,0.764 1.018,81.278 90.422,81.278
GND on GND (split plane): 90.422,0.764 1.018,0.764 1.018,81.278 90.422,81.278

## Keep-outs
Keep-Out Layer:
  the board outline again, w0.254

## Silkscreen, mask and mechanical layers (free items; w line width, h text height)
Top Overlay:
  drawing of 44 lines, arcs and shapes, not listed
  text "Beep Boop 1.0, Mason Dill, Damien Hu, Shreya Khanal" at 48.387,2.286 h0.76

## Text inside footprints (layer, text, board x,y; h text height)
J6: Top Overlay "18" at 28.019,76.084 h1.02; Top Overlay "17" at 28.019,73.384 h1.02; Top Overlay "2" at 3.539,76.084 h1.02; Top Overlay "1" at 3.839,73.384 h1.02
LS1: Top Overlay "+" at 12.002,12.034 h1.27 r90; Top Overlay "-" at 12.086,26.991 h1.27 r90
SW1: Mechanical 13 "1" at 58.613,39.077 h0.5; Mechanical 13 "2" at 59.903,39.065 h0.5; Mechanical 13 "ON" at 57.752,44.452 h0.5; Mechanical 13 "3" at 61.175,39.064 h0.5; Mechanical 13 "2" at 62.446,39.064 h0.5